# EAGLE board full bridge (EAGLE 5.08)
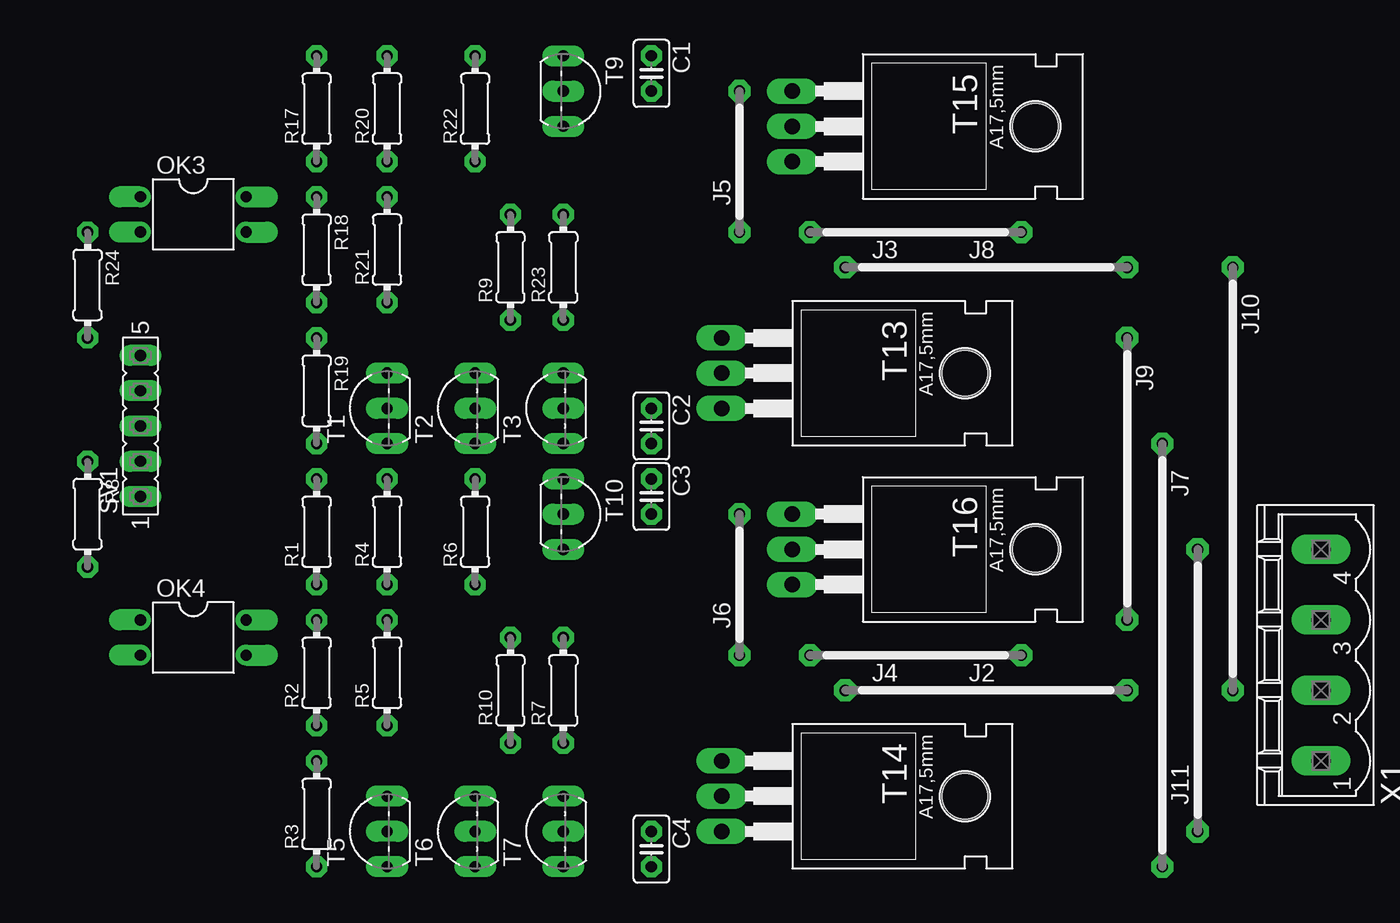
[diagram p0: board, top side]
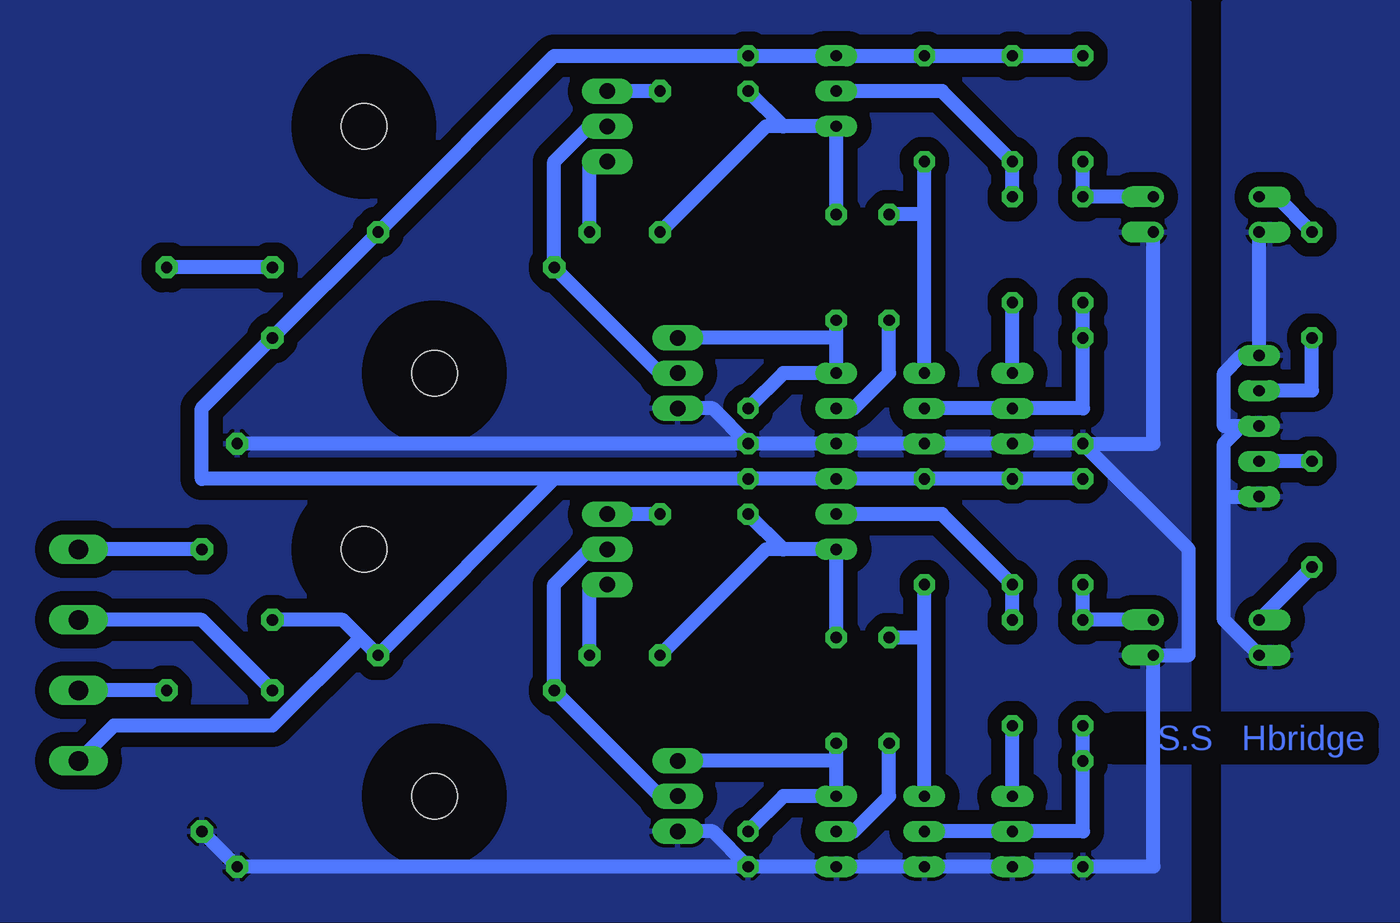
[diagram p1: board, bottom side, seen from below]

No outline drawn. Coordinates in mm, seen from the top.
Copper layers (1*16): Top 0.035mm / dielectric 1.5mm / Bottom 0.035mm
Design rules "default *": minimum track width 40mil, minimum drill 24mil, track to track 16mil, track to pad 12mil, pad to pad 8mil, via to via 8mil, smd to smd 0mil, copper to edge 40mil, drill to drill 8mil, minimum pad ring 14mil, minimum via ring 10mil, stop-mask expansion 4mil, vias tented up to drill 0mil, thermal gap 10mil

## Footprints (pad centres in the part's own frame; a part is rotated, then mirrored left to right if it is on the bottom)
C025-025X050 = drill 0.813 octagon: 1 -1.27,0; 2 1.27,0
15 = drill 0.813 pad 1.6 octagon: 1 -7.62,0; 2 7.62,0
20 = drill 0.813 pad 1.6 octagon: 1 -10.16,0; 2 10.16,0
10 = drill 0.813 pad 1.6 octagon: 1 -5.08,0; 2 5.08,0
30 = drill 0.813 pad 1.6 octagon: 1 -15.24,0; 2 15.24,0
DIL04 = drill 0.813 offset: 1 -1.27,-3.81; 2 1.27,-3.81; 3 1.27,3.81; 4 -1.27,3.81
0204/7 = drill 0.813 octagon: 1 -3.81,0; 2 3.81,0
FE05-1 = drill 0.813 long: 1 -5.08,0; 2 -2.54,0; 3 0,0; 4 2.54,0; 5 5.08,0
TO92-EBC = drill 0.813 long: B 0,-1.27; C 2.54,-1.27; E -2.54,-1.27
TO220 = drill 1.118 long: 1 -2.54,-6.35; 2 0,-6.35; 3 2.54,-6.35 | hole 3.302: 0,11.176
MSTBV4 = drill 1.397 long: 1 -7.62,0; 2 -2.54,0; 3 2.54,0; 4 7.62,0

## Placement (x,y rotation side)
C1  18p  [C025-025X050]  48.26,60.96 270 top
C2  18p  [C025-025X050]  48.26,35.56 270 top
C3  18p  [C025-025X050]  48.26,30.48 270 top
C4  18p  [C025-025X050]  48.26,5.08 270 top
J2  J15MM  [15]  67.31,19.05 180 top
J3  J20MM  [20]  72.39,46.99 0 top
J4  J20MM  [20]  72.39,16.51 0 top
J5  J10MM  [10]  54.61,54.61 90 top
J6  J10MM  [10]  54.61,24.13 90 top
J7  J30MM  [30]  85.09,19.05 270 top
J8  J15MM  [15]  67.31,49.53 180 top
J9  J20MM  [20]  82.55,31.75 270 top
J10  J30MM  [30]  90.17,31.75 270 top
J11  J20MM  [20]  87.63,16.51 90 top
OK3  PC814  [DIL04]  15.24,50.8 270 top
OK4  PC814  [DIL04]  15.24,20.32 270 top
R1  8k2  [0204/7]  24.13,27.94 90 top
R2  2k2  [0204/7]  24.13,17.78 90 top
R3  100k  [0204/7]  24.13,7.62 90 top
R4  2k2  [0204/7]  29.21,27.94 90 top
R5  8k2  [0204/7]  29.21,17.78 90 top
R6  4k7  [0204/7]  35.56,27.94 90 top
R7  1k  [0204/7]  41.91,16.51 90 top
R8  330  [0204/7]  7.62,29.21 270 top
R9  4k7  [0204/7]  38.1,46.99 90 top
R10  4k7  [0204/7]  38.1,16.51 90 top
R17  8k2  [0204/7]  24.13,58.42 90 top
R18  2k2  [0204/7]  24.13,48.26 270 top
R19  100k  [0204/7]  24.13,38.1 270 top
R20  2k2  [0204/7]  29.21,58.42 90 top
R21  8k2  [0204/7]  29.21,48.26 90 top
R22  4k7  [0204/7]  35.56,58.42 90 top
R23  1k  [0204/7]  41.91,46.99 90 top
R24  330  [0204/7]  7.62,45.72 270 top
SV1  [FE05-1]  11.43,35.56 90 top
T1  [TO92-EBC]  27.94,36.83 90 top
T2  [TO92-EBC]  34.29,36.83 90 top
T3  [TO92-EBC]  40.64,36.83 90 top
T5  [TO92-EBC]  27.94,6.35 90 top
T6  [TO92-EBC]  34.29,6.35 90 top
T7  [TO92-EBC]  40.64,6.35 90 top
T9  [TO92-EBC]  43.18,59.69 270 top
T10  [TO92-EBC]  43.18,29.21 270 top
T13  BDX53  [TO220]  59.69,39.37 270 top
T14  BDX53  [TO220]  59.69,8.89 270 top
T15  BDX54  [TO220]  64.77,57.15 270 top
T16  BDX54  [TO220]  64.77,26.67 270 top
X1  MST4V  [MSTBV4]  96.52,19.05 90 top

## Library data of the parts
C1-C4 R1-R10 R17-R24 = rcl
J2-J11 = jumper
OK3 OK4 = optocoupler
SV1 = con-lsta
T1-T3 T5-T7 T9 T10 T13-T16 = transistor
X1 = con-phoenix-508

## Nets
0V: OK3.2 OK4.2 SV1.1 SV1.3 SV1.5
+U: C1.1 C3.1 J2.1 J8.1 J9.1 J9.2 R1.2 R4.2 R6.2 R17.2 R20.2 R22.2 T9.E T10.E X1.1
GND: C2.2 C4.2 J7.1 J7.2 J11.1 OK3.3 OK4.3 R3.1 R19.2 T1.E T2.E T3.E T5.E T6.E T7.E T13.3 T14.3
N$1: OK3.1 R24.1
N$2: OK4.1 R8.2
N$3: C3.2 J6.1 R7.2 T10.C
N$4: R5.1 T5.C
N$5: R21.1 T1.C
N$6: J3.1 T13.2 T15.2
N$7: OK3.4 R17.1 R18.1
N$8: J6.2 T16.1
N$9: R18.2 R19.1 T1.B T2.B
N$10: R2.1 R3.2 T5.B T6.B
N$11: R6.1 R10.2 T6.C
N$12: OK4.4 R1.1 R2.2
N$13: R4.1 R5.2 T10.B
N$14: J5.2 T15.1
N$15: R20.1 R21.2 T9.B
N$16: R9.2 R22.1 T2.C
N$17: J4.2 X1.3
N$18: C4.1 R7.1 T7.C T14.1
N$19: C1.2 J5.1 R23.2 T9.C
N$20: C2.1 R23.1 T3.C T13.1
N$21: J3.2 J10.1
N$22: J4.1 T14.2 T16.2
N$23: R8.1 SV1.2
N$24: R24.2 SV1.4
N$25: J2.2 T16.3
N$26: J8.2 T15.3
N$27: R9.1 T3.B
N$28: R10.1 T7.B
N$29: J11.2 X1.4
N$30: J10.2 X1.2

## Tracks (layer width: path | path; a pad name or v marks a point on that pad's centre or on a via)
0V
  Bottom 1.016: OK3.2 SV1.5 12.7,40.64 13.97,39.37 13.97,35.56 12.7,35.56 | OK4.2 13.97,21.59 13.97,30.48 | 13.97,30.48 SV1.1 | 12.7,35.56 SV1.3 12.7,35.56 | 12.7,35.56 13.97,34.29 13.97,30.48
  pour Bottom (isolate 1.016): 0,0 13.97,0 13.97,66.04 0,66.04
+U
  Bottom 1.016: R17.2 R20.2 R22.2 T9.E C1.1 62.23,62.23 J8.1 J9.1 87.63,36.83 87.63,31.75 62.23,31.75 | R1.2 R4.2 R6.2 T10.E C3.1 62.23,31.75 | 76.2,20.32 77.47,21.59 J9.2 | 76.2,20.32 J2.1 62.23,31.75 | X1.1 93.98,13.97 82.55,13.97 76.2,20.32
GND
  Bottom 1.016: R19.2 T1.E T2.E T3.E C2.2 | OK3.3 19.05,34.29 R19.2 | C2.2 50.8,36.83 T13.3 | C2.2 J7.1 | J11.1 J7.2 C4.2 | C4.2 50.8,6.35 T14.3 | C4.2 T7.E T6.E T5.E R3.1 19.05,3.81 OK4.3 16.51,19.05 16.51,26.67 R19.2
  pour Bottom (isolate 1.016): 16.51,0 102.87,0 102.87,66.04 16.51,66.04
N$1
  Bottom 1.016: R24.1 10.16,52.07 OK3.1
N$2
  Bottom 1.016: OK4.1 R8.2
N$3
  Bottom 1.016: R7.2 T10.C 45.72,26.67 | 45.72,26.67 C3.2 | J6.1 46.99,26.67 45.72,26.67
N$4
  Bottom 1.016: T5.C R5.1
N$5
  Bottom 1.016: T1.C R21.1
N$6
  Bottom 1.016: T13.2 54.61,39.37 J3.1 62.23,54.61 59.69,57.15 T15.2
N$7
  Bottom 1.016: OK3.4 R18.1 R17.1
N$8
  Bottom 1.016: J6.2 T16.1
N$9
  Bottom 1.016: R18.2 R19.1 24.13,36.83 T1.B T2.B
N$10
  Bottom 1.016: R2.1 R3.2 24.13,6.35 T5.B T6.B
N$11
  Bottom 1.016: T6.C 35.56,20.32 | 35.56,20.32 R10.2 | 35.56,20.32 R6.1
N$12
  Bottom 1.016: OK4.4 R2.2 R1.1
N$13
  Bottom 1.016: R5.2 R4.1 34.29,29.21 T10.B
N$14
  Bottom 1.016: J5.2 T15.1
N$15
  Bottom 1.016: R21.2 R20.1 34.29,59.69 T9.B
N$16
  Bottom 1.016: T2.C 35.56,50.8 | 35.56,50.8 R9.2 | 35.56,50.8 R22.1
N$17
  Bottom 1.016: J4.2 87.63,21.59 X1.3
N$18
  Bottom 1.016: 41.91,11.43 R7.1 | 41.91,11.43 T7.C 45.72,8.89 C4.1 | 41.91,11.43 T14.1
N$19
  Bottom 1.016: R23.2 T9.C 45.72,57.15 | 45.72,57.15 C1.2 | J5.1 46.99,57.15 45.72,57.15
N$20
  Bottom 1.016: 41.91,41.91 R23.1 | 41.91,41.91 T3.C 45.72,39.37 C2.1 | 41.91,41.91 T13.1
N$21
  Bottom 1.016: J3.2 J10.1
N$22
  Bottom 1.016: T14.2 54.61,8.89 J4.1 62.23,24.13 59.69,26.67 T16.2
N$23
  Bottom 1.016: R8.1 SV1.2
N$24
  Bottom 1.016: R24.2 7.62,38.1 SV1.4
N$25
  Bottom 1.016: J2.2 59.69,24.13 T16.3
N$26
  Bottom 1.016: J8.2 59.69,54.61 T15.3
N$27
  Bottom 1.016: T3.B 40.64,36.83 38.1,39.37 R9.1
N$28
  Bottom 1.016: T7.B 40.64,6.35 38.1,8.89 R10.1
N$29
  Bottom 1.016: J11.2 X1.4
N$30
  Bottom 1.016: J10.2 X1.2

## Text on the board
Bottom: S.S Hbridge